# EAGLE board pps_rs232 (EAGLE 9.6.1)
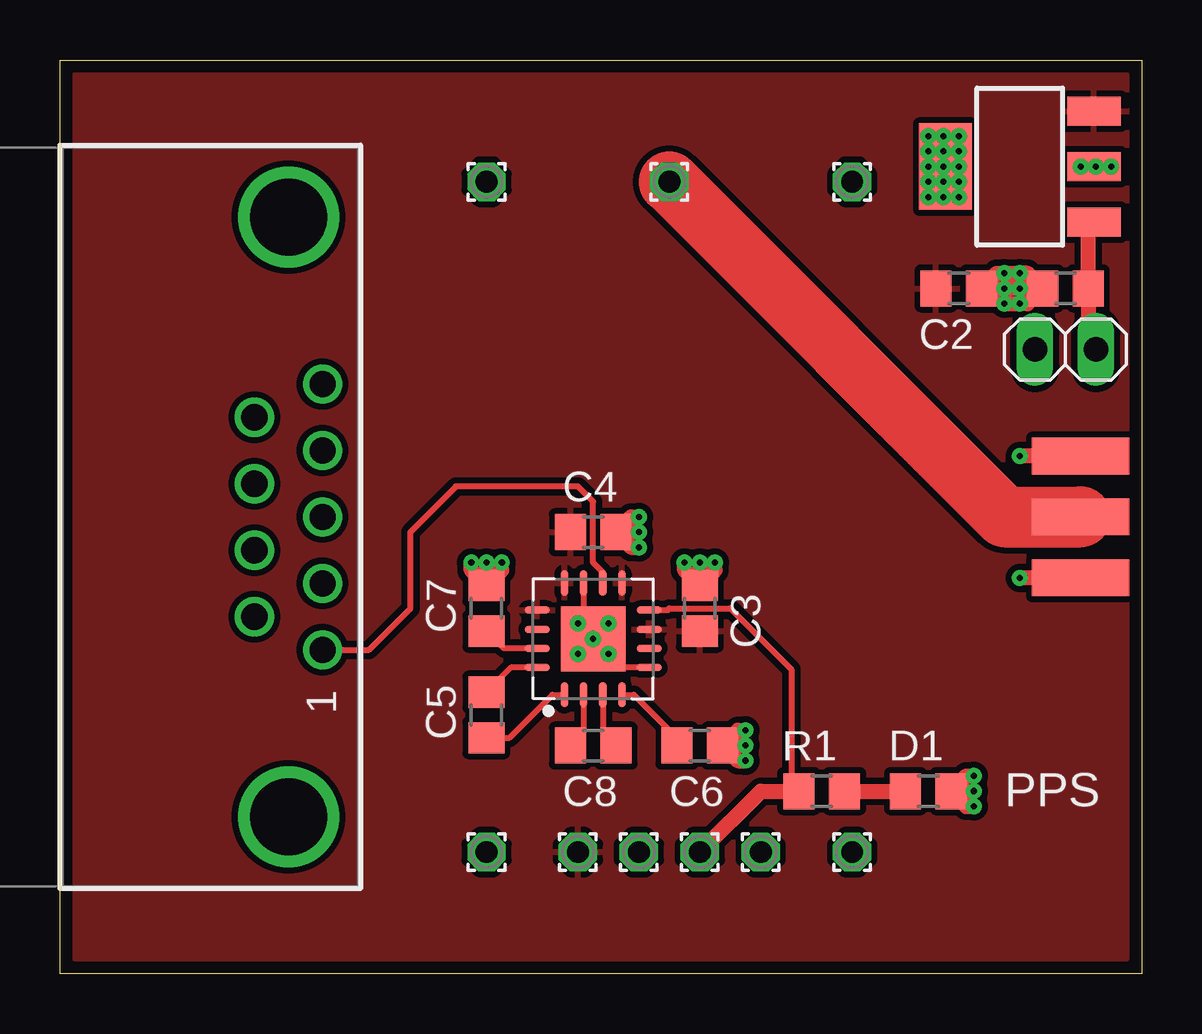
[diagram p0: board, top side]
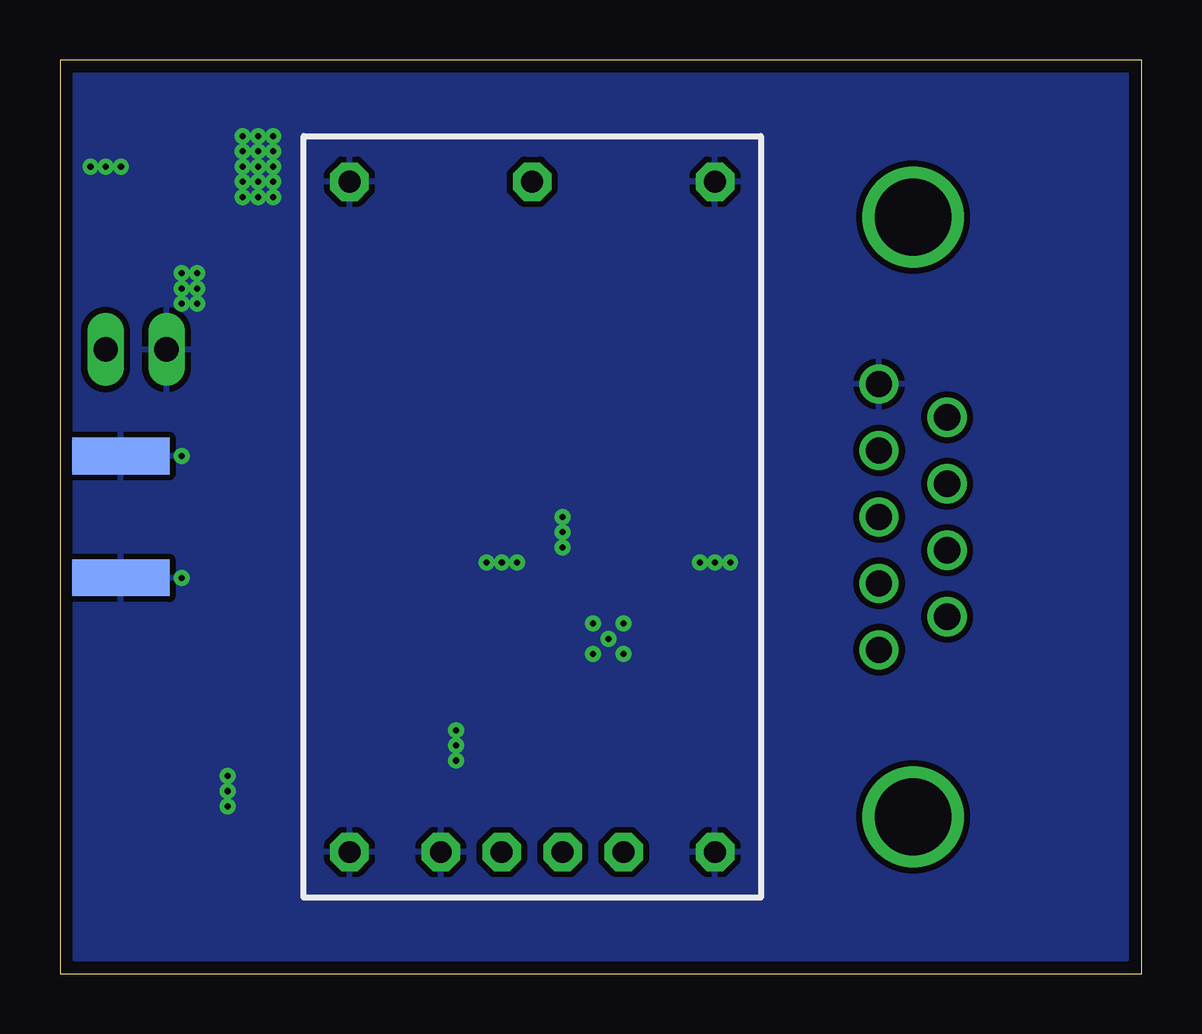
[diagram p1: board, bottom side, seen from below]

Size 45.09 x 38.1 mm. Coordinates in mm from the lower left corner, seen from the top.
Outline: 0,0 0,38.1 45.09,38.1 45.09,0 0,0
Copper layers (1*16): Top 0.035mm / dielectric 0.5mm / Bottom 0.035mm
Design rules "two_layer": minimum track width 5mil, minimum drill 10mil, track to track 5mil, track to pad 5mil, pad to pad 5mil, via to via 5mil, smd to smd 5mil, copper to edge 20mil, drill to drill 8mil, minimum pad ring 10mil, minimum via ring 8mil, stop-mask expansion 4mil, vias tented up to drill 0mil, thermal gap 10mil

## Footprints (pad centres in the part's own frame; a part is rotated, then mirrored left to right if it is on the bottom)
R0805 = smd 1.3 x 1.5: 1 -0.95,0; 2 0.95,0
618009211821 = drill 1.09: 1 5.54,1.42; 2 2.77,1.42; 3 0,1.42; 4 -2.77,1.42; 5 -5.54,1.42; 6 4.155,-1.42; 7 1.385,-1.42; 8 -1.385,-1.42; 9 -4.155,-1.42 | drill 3.2: Z1 -12.5,0; Z2 12.5,0
SMA-EDGE = smd 1.524 x 4.064: GND@0 0,0; GND@1 5.08,0; SIG 2.54,0 | smd 1.524 x 4.064 bottom: GND@2 0,0; GND@3 5.08,0
1,6/0,9 = drill 0.914 pad 1.6 octagon: 1 0,0
SOT223 = smd 1.219 x 2.235: 1 -2.311,-3.099; 2 0,-3.099; 3 2.311,-3.099 | smd 3.6 x 2.2: 4 0,3.099
1X02 = drill 1.016 long: 1 -1.27,0; 2 1.27,0
QFN80P500X500X100-17T270 = smd 1.053 x 0.32: 1 -2.329,1.2; 2 -2.329,0.4; 3 -2.329,-0.4; 4 -2.329,-1.2; 9 2.329,-1.2; 10 2.329,-0.4; 11 2.329,0.4; 12 2.329,1.2 | smd 0.32 x 1.053: 5 -1.2,-2.329; 6 -0.4,-2.329; 7 0.4,-2.329; 8 1.2,-2.329; 13 1.2,2.329; 14 0.4,2.329; 15 -0.4,2.329; 16 -1.2,2.329 | smd 2.7 x 2.7: 17 0,0

## Placement (x,y rotation side)
C1  100u  [R0805]  41.91,28.57 180 top
C2  100u  [R0805]  37.47,28.57 180 top
C3  100n  [R0805]  26.67,15.24 270 top
C4  100n  [R0805]  22.23,18.41 180 top
C5  100n  [R0805]  17.78,10.79 270 top
C6  100n  [R0805]  26.67,9.53 0 top
C7  100n  [R0805]  17.78,15.24 90 top
C8  100n  [R0805]  22.23,9.53 0 top
D1  1k  [R0805]  36.2,7.62 180 top
E$1  [618009211821]  9.53,19.05 270 top
E$2  [SMA-EDGE]  42.55,16.51 90 top
E$3  [1,6/0,9]  17.78,5.08 0 top
E$4  [1,6/0,9]  33.02,5.08 0 top
E$5  [1,6/0,9]  17.78,33.02 0 top
E$6  [1,6/0,9]  33.02,33.02 0 top
E$7  [1,6/0,9]  24.13,5.08 0 top
E$8  [1,6/0,9]  26.67,5.08 0 top
E$9  [1,6/0,9]  21.59,5.08 0 top
E$10  [1,6/0,9]  29.21,5.08 0 top
E$11  [1,6/0,9]  25.4,33.02 0 top
E$12  [SOT223]  40.01,33.66 90 top
E$13  [1X02]  41.91,26.04 0 top
E$14  [QFN80P500X500X100-17T270]  22.23,13.97 90 top
R1  1k  [R0805]  31.75,7.62 180 top

## Library data of the parts
C1-C8 D1 R1 = rcl
E$1 = Wurth_Elektronik_Electromechanic_Input-Output_Connectors_rev19d
E$2 = SparkFun-Retired
E$3-E$11 = wirepad
E$12 = ref-packages
E$13 = pinhead
E$14 = ref-packages-3d

## Nets
!PPS: E$1.1 E$14.10
BPSK: E$2.SIG E$11.1
GND: C1.2 C2.1 C3.1 C4.1 C6.2 C7.2 D1.1 E$1.5 E$2.GND@0 E$2.GND@1 E$2.GND@2 E$2.GND@3 E$3.1 E$4.1 E$5.1 E$6.1 E$10.1 E$12.2 E$12.4 E$13.1 E$14.5 E$14.11 E$14.17
PPS: E$8.1 E$14.8 R1.2
S$2: D1.2 R1.1
S$4: C5.1 E$14.16
S$5: C5.2 E$14.1
S$6: C8.1 E$14.2
S$7: C8.2 E$14.3
S$8: C6.1 E$14.4
S$9: C7.1 E$14.15
V3.3: C2.2 C3.2 C4.2 E$9.1 E$12.3 E$14.7 E$14.9 E$14.12 E$14.13
V5: C1.1 E$12.1 E$13.2

## Tracks (layer width: path | path; a pad name or v marks a point on that pad's centre or on a via)
!PPS
  Top 0.254: E$1.1 12.88,13.51 14.61,15.24 14.61,18.41 16.51,20.32 21.59,20.32 22.23,19.68 22.23,17.14 22.62,16.75 E$14.10
BPSK
  Top 2.54: E$11.1 39.37,19.05 E$2.SIG
GND  (via drill 0.25)
  Top 0.254: E$14.11 21.82,14.84 v21.59,14.61 | E$14.5 23.43,12.77 v22.86,13.34
  Top 0.635: E$2.GND@3 v40.01,21.59 | E$2.GND@2 v40.01,16.51 | E$12.2 v42.55,33.66 | E$12.4 v36.83,33.66 | C2.1 39.05,29.21 v39.37,29.21 v40.01,29.21 | C2.1 v39.37,28.57 | C2.1 38.73,28.57 v39.37,27.94 | C1.2 v40.01,28.57 | C1.2 40.33,29.21 v40.01,29.21 | C1.2 40.33,27.94 v40.01,27.94 v39.37,27.94 | v40.01,29.21 v40.01,28.57 | v40.01,28.57 v39.37,28.57 | v39.37,28.57 v39.37,27.94 | C7.2 v17.78,17.14 | C7.2 17.14,16.82 v17.14,17.14 | C7.2 18.41,16.82 v18.41,17.14 | C4.1 v24.13,18.41 | C4.1 23.81,19.05 v24.13,19.05 | C4.1 23.81,17.78 v24.13,17.78 | C3.1 v26.67,17.14 | C3.1 26.04,16.82 v26.04,17.14 | C3.1 27.3,16.82 v27.3,17.14 | C6.2 v28.57,9.53 | C6.2 28.25,10.16 v28.57,10.16 | C6.2 28.25,8.89 v28.57,8.89 | D1.1 v38.1,7.62 | D1.1 37.78,8.26 v38.1,8.26 | D1.1 37.78,6.99 v38.1,6.99
  other vias: 36.2,34.92 36.2,34.29 36.2,33.66 36.2,33.02 36.2,32.38 36.83,32.38 37.47,32.38 37.47,33.02 37.47,33.66 37.47,34.29 37.47,34.92 36.83,34.92 36.83,34.29 36.83,33.02 43.81,33.66 43.18,33.66 21.59,13.34 22.23,13.97 22.86,14.61
  pour Bottom (isolate 0.254): 0.64,37.47 44.45,37.47 44.45,0.64 0.64,0.64
PPS
  Top 0.254: E$14.8 25.33,15.17 25.4,15.24 27.94,15.24 30.48,12.7 30.48,7.62
  Top 0.635: E$8.1 29.21,7.62 30.48,7.62 R1.2
S$2
  Top 0.635: R1.1 D1.2
S$4
  Top 0.254: E$14.16 18.8,12.77 C5.1
S$5
  Top 0.254: C5.2 18.73,9.85 20.53,11.64 E$14.1
S$6
  Top 0.254: E$14.2 21.82,10.07 C8.1
S$7
  Top 0.254: E$14.3 22.62,10.07 C8.2
S$8
  Top 0.254: E$14.4 23.92,11.64 25.72,9.84 C6.1
S$9
  Top 0.254: E$14.15 18.5,13.57 C7.1
V3.3
  pour Top (isolate 0.254): 0.64,37.47 44.45,37.47 44.45,0.64 0.64,0.64
V5
  Top 0.635: E$12.1 42.86,31.1 C1.1 42.86,26.36 E$13.2

## Text on the board
tPlace: PPS